# Altium PCB SwiftCtrl.PcbDoc
Units mil, origin at the board's own origin, x right, y up, seen from the top; angles counter-clockwise.
Board outline 5511.51 x 1574.8 mil, 2 copper layers (Top Layer, Bottom Layer); 62 components, 51 nets, 266 pads, 35 vias.
Unrouted connection lines stored in the file: 5.
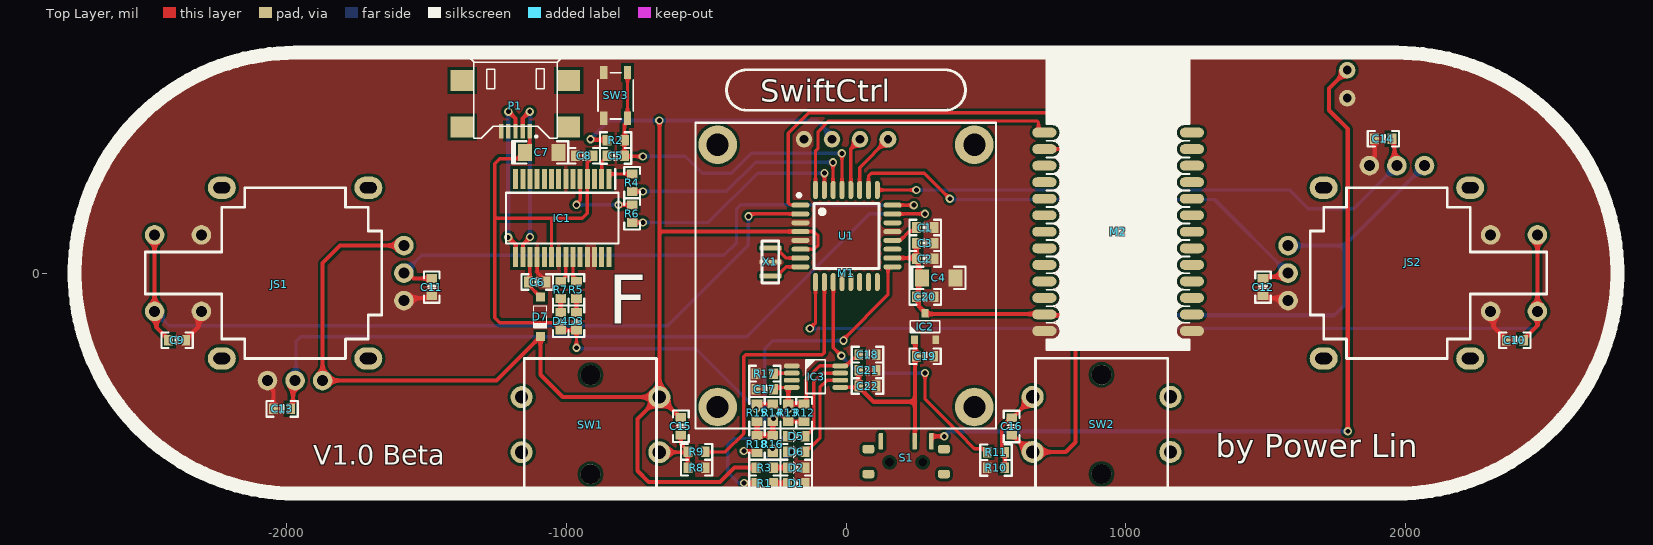
[diagram p0: Top Layer view]
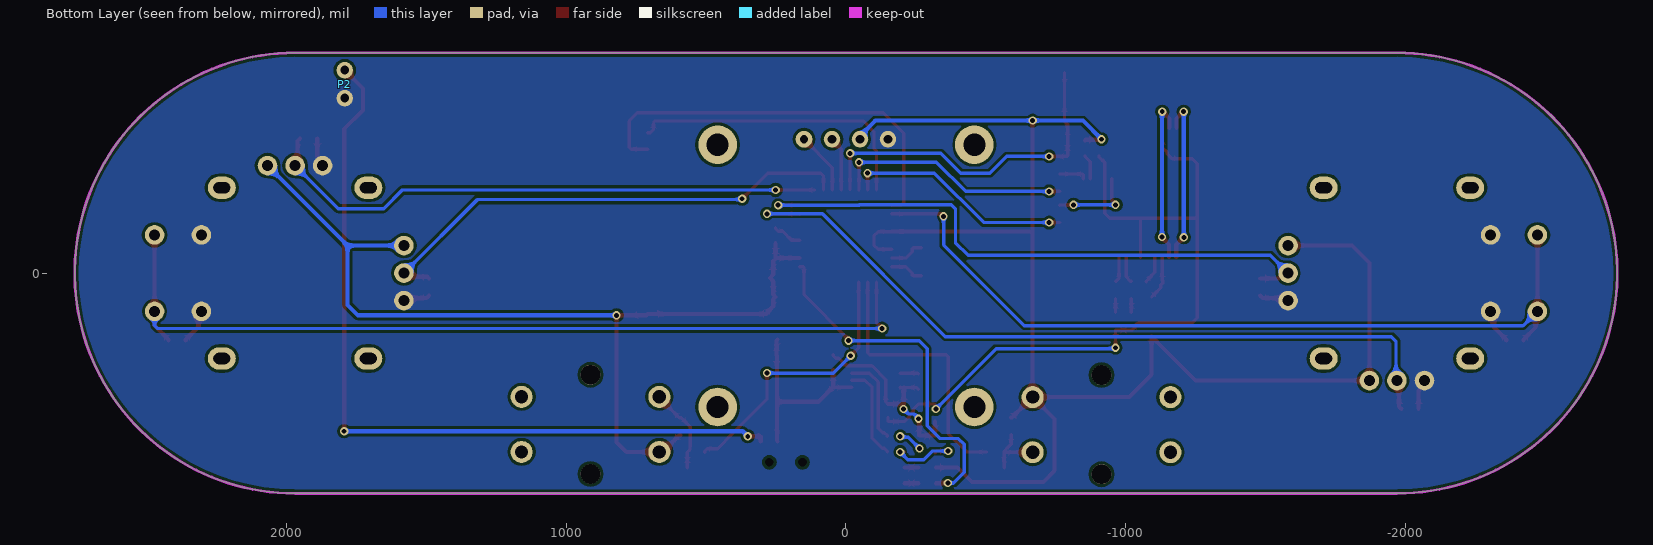
[diagram p1: Bottom Layer view, seen from below]
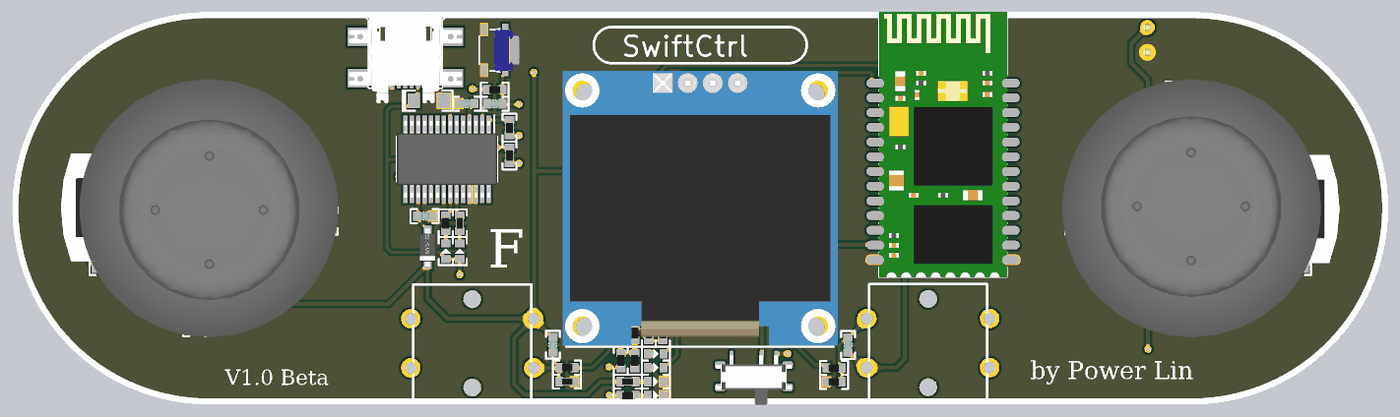
[diagram p2: 3D render of the assembled board from above, using the file's embedded part models]

## Layer stack, top to bottom
Top Solder: solder mask 0.4, Solder Resist, Dk 3.5
Top Layer: signal copper 1.4
Dielectric 1: dielectric 12.6, FR-4, Dk 4.8
Bottom Layer: signal copper 1.4
Bottom Solder: solder mask 0.4, Solder Resist, Dk 3.5

## Board outline
-1968.5,-787.4 cw(c-1968.5,0) -1968.5,787.4 1968.5,787.4 cw(c1968.5,0) 1968.5,-787.4

## Design rules (kind name [scope] priority, off if disabled: settings)
Clearance [All] p1: gap=10 ignorepadtopadclearanceinfootprint=TRUE except(0: Arc-Hole Track-Hole SMDPad-Hole THPad-Hole Via-Hole Fill-Hole Poly-Hole Region-Hole Text-Hole)
ComponentClearance [All] p1: gap=0 collisioncheckmode=3 verticalgap=0 showdistances=FALSE
DiffPairsRouting [All] p1: maxlimit=10 minlimit=10 mostfreqgap=10 toplayer_minwidth=15 toplayer_maxwidth=15 toplayer_prefwidth=15 bottomlayer_minwidth=15 bottomlayer_maxwidth=15 bottomlayer_prefwidth=15 maxuncoupledlength=500
PlaneConnect [All] p1: planeconnectstyle=Direct reliefexpansion=20 reliefentries=4 reliefconductorwidth=10 reliefairgap=10
PolygonConnect [All] p1: connectstyle=Direct reliefconductorwidth=10 reliefentries=4 polygonreliefangle="90 Angle" airgapwidth=10
RoutingVias [All] p1: holewidth=17.72 width=29.53 viastyle="Through Hole" minholewidth=17.72 minwidth=29.53 maxholewidth=17.72 maxwidth=29.53
SolderMaskExpansion [All] p1: expansion=4 istentingtop=FALSE
Width [All] p1: maxlimit=50 minlimit=12 preferedwidth=12
27 further rules are at their usual default settings.

## Classes and differential pairs
component class U_Power: C17 C18 C19 C20 C21 C22 D5 D6 IC2 IC3 P2 R12 R13 R14 R15 R16 R17 R18 S1
component class U_MCU: C1 C2 C3 C4 C5 C6 C7 C8 D1 D2 D3 D4 D7 IC1 P1 R1 R2 R3 R4 R5 R6 R7 SW3 U1 X1
component class U_Dev: C9 C10 C11 C12 C13 C14 C15 C16 JS1 JS2 M1 M2 R8 R9 R10 R11 SW1 SW2
differential pair USB: +USB_P -USB_N

## Components (designator, comment, footprint, x,y, rotation, side; value= is the part's Value field where it differs from the comment)
C1 "100nF" CAP-0603 283.1,162.85 r180 top
C2 "1uF" CAP-0603 283,51 r180 top
C3 "1uF" CAP-0603 283,107 r180 top
C4 "4.7uF 16V" CAP-AUX-3216 316,-25 r180 top
C5 "100nF" CAP-0603 -823,419 r0 top
C6 "100nF" CAP-0603 -1103.35,-31.77 r180 top
C7 "4.7uF 16V" CAP-AUX-3216 -1103.35,423.23 r180 top
C8 "100nF" CAP-0603 -935.04,419.17 r0 top
C9 "220pF" CAP-0603 -2390,-240 r180 top
C10 "220pF" CAP-0603 2390,-240 r0 top
C11 "220pF" CAP-0603 -1480,-50 r90 top
C12 "220pF" CAP-0603 1490,-50 r270 top
C13 "220pF" CAP-0603 -2015,-485 r180 top
C14 "220pF" CAP-0603 1920,480 r0 top
C15 "100nF" CAP-0603 -590,-547 r90 top
C16 "100nF" CAP-0603 592,-548 r270 top
C17 "10nF" CAP-0603 -290,-415 r180 top
C18 "100nF" CAP-0603 76.84,-291.41 r0 top
C19 "1uF" CAP-0603 282.45,-297 r180 top
C20 "1uF" CAP-0603 283,-85 r180 top
C21 "100nF" CAP-0603 76.84,-347.41 r180 top
C22 "10nF" CAP-0603 76.84,-403.41 r180 top
D1 "GREEN" LED-0603 -178,-751 r0 top
D2 "RED" LED-0603 -178,-695 r0 top
D3 "RED" LED-0603 -963,-172.03 r90 top
D4 "RED" LED-0603 -1019.35,-172.03 r90 top
D5 "RED" LED-0603 -178,-583 r0 top
D6 "RED" LED-0603 -178,-639 r0 top
D7 "SS14" SOD_123 -1092,-156 r90 top
IC1 "FT232RL" SSOP -1013.78,196.85 r270 top
IC2 "ME6211A33M3G-N" SOT-23-3 282.45,-190.91 r270 top
IC3 "TP4056" MSOP_E120_P0.5_10 -108.74,-371 r270 top
JS1 "JoyStick" JOYSTICK -1968.5,0 r0 top locked
JS2 "JoyStick" JOYSTICK 1968.5,0 r180 top locked
M1 "OLED_0.96_Moudle" OLED_0.96_MOUDLE 0,0 r0 top locked
M2 "HC-06" HC-05/06/08V15 972.44,147.64 r90 top
P1 "USB_MICRO" "MICRO USB座 -全贴片" -1181,597.5 r0 top
P2 "HDR1x2_2.54" HDR1X2_2.54_90 1791,725 r180 bottom
R1 "330R" R-0603 -290,-751 r0 top
R2 "1K" R-0603 -823,475 r0 top
R3 "10K" R-0603 -290,-695 r0 top
R4 "1K" R-0603 -764,323 r90 top
R5 "1K" R-0603 -963,-60.1 r270 top
R6 "1K" R-0603 -764,211.73 r90 top
R7 "1K" R-0603 -1019.35,-60.1 r270 top
R8 "4.7k" R-0603 -533.9,-695 r180 top
R9 "1k" R-0603 -533.9,-639 r180 top
R10 "4.7k" R-0603 536,-696 r0 top
R11 "1k" R-0603 536,-640 r0 top
R12 "1R" R-0603 -150,-499 r270 top
R13 "1R" R-0603 -206,-499 r270 top
R14 "1R" R-0603 -262,-499 r90 top
R15 "1R" R-0603 -318,-499 r90 top
R16 "2K" R-0603 -262,-611 r90 top
R17 "1.2K" R-0603 -290,-359 r0 top
R18 "10K" R-0603 -318,-611 r90 top
S1 "Switch_SPDT" SWITCHSPDT_2.8X6.6_90 214.94,-676 r0 top value="SPDT 3P"
SW1 "KEY" KEY_12*12*7.3 -913.06,-541.57 r0 top locked
SW2 "KEY" KEY_12*12*7.3 913.06,-540.57 r180 top locked
SW3 "KEY" KEY-4P-4.2*3.4*2.5 -823,635 r90 top
U1 "ATMEGA328P-AU" TQFP-32_7X7X08P 1.5,132.6 r270 top
X1 "16MHz" CSTCE_G(A)村田晶振 -270,40 r90 top

## Footprints (in the part's own frame and the unit in brackets; to place one, negate y for a bottom-side part, rotate by r counter-clockwise, add the part's x,y. Pads: shape width x height; smd on the part's side, far side on the other; paste and mask are expansions set on the pad)
CAP-0603 [mm]
  rect 0.8x0.96 smd: 1(-0.79,0) 2(0.79,0)
  silkscreen extent -1.42,-0.71 1.42,0.71, body extent -0.76,-0.39 0.76,0.39, height 0.9
CAP-AUX-3216 [mil] "钽电容1206大小"
  rect 50x60 smd: 1(44,-8) 2(-76,-8)
  silkscreen extent -111,-48 89,32, body extent -82,-45 52,26, height 67
CSTCE_G(A)村田晶振 [mm]
  rrect50% 0.45x2 smd: 1(1.27,0) 2(0,0) 3(-1.27,0)
  silkscreen extent -1.91,-0.76 1.91,0.76, body extent -1.9,-0.8 1.9,0.8, height 1
HC-05/06/08V15 [mm]
  oval 0.9x2.2 smd: 1(9,6.7) 2(7.5,6.7) 3(6,6.7) 4(4.5,6.7) 5(3,6.7) 6(1.5,6.7) 7(0,6.7) 8(-1.5,6.7) 9(-3,6.7) 10(-4.5,6.7) 11(-6,6.7) 12(-7.5,6.7) 13(-9,6.7) 22(-9,-6.7) 23(-7.5,-6.7) 24(-6,-6.7) 25(-4.5,-6.7) 26(-3,-6.7) 27(-1.5,-6.7) 28(0,-6.7) 29(1.5,-6.7) 30(3,-6.7) 31(4.5,-6.7) 32(6,-6.7) 33(7.5,-6.7) 34(9,-6.7)
  silkscreen extent -10.75,-6.5 16.15,6.5, body extent -10.77,-6.5 16.23,6.5, height 4.31
HDR1X2_2.54_90 [mm]
  round 1.5 hole 0.813: 1(0,0) 2(0,-2.54)
  body extent -0.38,-3.71 10.76,1.17, height 2.52
JOYSTICK [mil]
  oval 100x80 hole 40 slot 60 at 0 deg: 0(-261.81,-305.12) 0(-261.81,305.12) 0(261.81,-305.12) 0(261.81,305.12)
  round 70 hole 39.37: 1(-98.43,-383.86) 2(0,-383.86) 3(98.43,-383.86) 4(388.86,-98.43) 5(388.86,0) 6(388.86,98.43) 7(-501.97,136.57) 8(-334.8,136.57) 9(-501.97,-136.57) 10(-334.8,-136.57)
  silkscreen extent -535,-305 310,305, body extent -592,-518 518,518, height 1126
KEY-4P-4.2*3.4*2.5 [mm] "SKRPABE010"
  rect 1.2x0.65 smd: 1(-2.075,1.075) 1(2.075,1.075) 2(-2.075,-1.075) 2(2.075,-1.075)
  silkscreen extent -2.15,-1.6 2.05,1.6, body extent -2.35,-1.6 2.25,1.6, height 2.5
KEY_12*12*7.3 [mm] "轻触开关 B3F-4055"
  round 1.8 hole 1.8: 0(0,-4.5) 0(0,4.5)
  round 2 hole 1.2: 1(6.25,-2.5) 2(6.25,2.5) 3(-6.25,-2.5) 4(-6.25,2.5)
  silkscreen extent -6,-6 6,6, body extent -6,-6.02 6.04,6, height 9
LED-0603 [mm]
  rect 0.8x0.96 smd: 1(-0.79,0) 2(0.79,0)
  silkscreen extent -1.42,-0.71 1.42,0.71, body extent -0.81,-0.4 0.81,0.4, height 0.6
"MICRO USB座 -全贴片" [mm]
  rect 2.1x1.9 smd: 0(-4.826,-1.918) 0(-4.826,2.299) 0(4.826,-1.918) 0(4.826,2.299)
  rect 0.4x1.35 smd: 1(1.3,-2.299) 2(0.65,-2.299) 3(0,-2.299) 4(-0.65,-2.299) 5(-1.3,-2.299)
  silkscreen extent -4.24,-2.96 4.27,4.43, body extent -5.74,-4.5 5.76,4.8, height 2.74
MSOP_E120_P0.5_10 [mm]
  oval 0.45x1.45 smd: 1(-1,-2.159) 2(-0.35,-2.159) 3(0.3,-2.159) 4(0.95,-2.159) 5(0.95,2.241) 6(0.3,2.241) 7(-0.35,2.241) 8(-1,2.241)
  silkscreen extent -1.55,-0.89 1.5,0.89, body extent -1.52,-2.45 1.47,2.45, height 0.97
OLED_0.96_MOUDLE [mm]
  round 1.5 hole 0.813: 1(-3.81,12.15) 2(-1.27,12.15) 3(1.27,12.15)
  round 1.524 hole 0.762: 4(3.81,12.15)
  round 3.5 hole 2: 8(-11.65,11.65) 9(-11.65,-12.15) 10(11.65,-12.15) 11(11.65,11.65)
  silkscreen extent -13.65,-14.1 13.6,13.65, body extent -14,-14 14,14, height 10.5
R-0603 [mm]
  rect 0.8x0.96 smd: 1(-0.79,0) 2(0.79,0)
  silkscreen extent -1.42,-0.71 1.42,0.71, body extent -0.76,-0.38 0.76,0.38, height 0.41
SOD_123 [mm]
  rect 0.8x0.8 smd: 1(1.8,0) 2(-1.8,0)
  silkscreen extent -1.02,-0.6 1.02,0.6, body extent -1.95,-0.85 1.9,0.85, height 1.42
SOT-23-3 [mil]
  rect 30x24 smd: 1(47,-38) 2(47,38) 3(-47,0)
  silkscreen extent -21,-53 21,53, body extent -55,-57 55,57, height 51
SSOP [mm]
  rect 1.8x0.45 smd: 1(-3.55,4.225) 2(-3.55,3.575) 3(-3.55,2.925) 4(-3.55,2.275) 5(-3.55,1.625) 6(-3.55,0.975) 7(-3.55,0.325) 8(-3.55,-0.325) 9(-3.55,-0.975) 10(-3.55,-1.625) 11(-3.55,-2.275) 12(-3.55,-2.925) 13(-3.55,-3.575) 14(-3.55,-4.225) 15(3.55,-4.225) 16(3.55,-3.575) 17(3.55,-2.925) 18(3.55,-2.275) 19(3.55,-1.625) 20(3.55,-0.975) 21(3.55,-0.325) 22(3.55,0.325) 23(3.55,0.975) 24(3.55,1.625) 25(3.55,2.275) 26(3.55,2.925) 27(3.55,3.575) 28(3.55,4.225)
  silkscreen extent -4.45,-5.1 2.3,5.1, body extent -3.9,-5.1 3.9,5.1, height 2
SWITCHSPDT_2.8X6.6_90 [mil]
  rrect50% 42x30 smd: 0(-135,-42) 0(-135,47) 0(135,-42) 0(135,47)
  round 10 hole 31.5: 0(-59.06,0) 0(59.06,0)
  rrect50% 16x60 smd: 1(90,75) 2(30,75) 3(-90,75)
  body extent -152,-111 151,86, height 55
TQFP-32_7X7X08P [mm]
  oval 0.45x1.65 smd: 1(-2.8,-4.175) 2(-2,-4.175) 3(-1.2,-4.175) 4(-0.4,-4.175) 5(0.4,-4.175) 6(1.2,-4.175) 7(2,-4.175) 8(2.8,-4.175) 17(2.8,4.175) 18(2,4.175) 19(1.2,4.175) 20(0.4,4.175) 21(-0.4,4.175) 22(-1.2,4.175) 23(-2,4.175) 24(-2.8,4.175)
  oval 1.65x0.45 smd: 9(4.175,-2.8) 10(4.175,-2) 11(4.175,-1.2) 12(4.175,-0.4) 13(4.175,0.4) 14(4.175,1.2) 15(4.175,2) 16(4.175,2.8) 25(-4.175,2.8) 26(-4.175,2) 27(-4.175,1.2) 28(-4.175,0.4) 29(-4.175,-0.4) 30(-4.175,-1.2) 31(-4.175,-2) 32(-4.175,-2.8)
  silkscreen extent -3.85,-4.45 2.95,2.95, body extent -4.5,-4.5 4.5,4.5, height 1.6

## Part data
C1 C2 C3 C5 C6 C8 C9 C10 C11 C12 C13 C14 C15 C16 C17 C18 C19 C20 C21 C22: library part CAP, "贴片电容", Package=0402, SuppliersPartNumber=C52923, ComponentLink1Description=供应商链接, ComponentLink1URL=http://www.szlcsc.com/product/details_53938.html, Supplier=LC
C4 C7: library part CAP-POL, "贴片电容-有极性", Package=3528, SuppliersPartNumber=C16133, ComponentLink1Description=供应商链接, ComponentLink1URL=http://www.szlcsc.com/product/details_16815.html, Supplier=LC
D1 D2 D3 D4 D5 D6: library part LED, "发光二极管", Package=0603, SuppliersPartNumber=C2290, ComponentLink1Description=供应商链接, ComponentLink1URL=http://www.szlcsc.com/product/details_2663.html, Supplier=LC
D7: library part DIODE, "二极管", Package=SMA(DO-214AC), SuppliersPartNumber=C22452, ComponentLink1Description=供应商链接, ComponentLink1URL=http://www.szlcsc.com/product/details_23178.html, Supplier=LC
IC1: "USB to UART", Manufacturer_Name="FTDI Chip", RS Part Number=0406580P, Datasheet Link=http://www.ftdichip.com/Support/Documents/DataSheets/ICs/DS_FT232R.pdf, Height=2mm, Manufacturer_Part_Number=FT232RL, RS Price/Stock=http://uk.rs-online.com/web/p/products/0406580P
IC2: "线性稳压", Manufacturer_Name=Nexperia, Manufacturer_Part_Number=SI2302DS, Mouser Part Number=N/A, RS Part Number=7983053P, Datasheet Link=https://assets.nexperia.com/documents/data-sheet/SI2302DS.pdf, Height=1.1mm, Mouser Price/Stock=https://www.mouser.com/Search/Refine.aspx?Keyword=N%2FA, RS Price/Stock=http://uk.rs-online.com/web/p/products/7983053P
IC3: "锂电池充电（1A 线性）", Manufacturer_Name="Nanjing Extension Microelectronics", Manufacturer_Part_Number=TP4056-42-ESOP8, Datasheet Link=https://datasheet.lcsc.com/szlcsc/1906261508_Nanjing-Extension-Microelectronics-TP4056-42-ESOP8_C16581.pdf, Height=1.75mm
JS1 JS2: "摇杆"
M1: "OLED 屏"
M2: library part HC-05/06, "HC05/06 蓝牙模块（贴片）", Manufacturer_Name="FTDI Chip", Manufacturer_Part_Number=FT232RL, RS Part Number=0406580P, Datasheet Link=http://www.ftdichip.com/Support/Documents/DataSheets/ICs/DS_FT232R.pdf, Height=2mm, RS Price/Stock=http://uk.rs-online.com/web/p/products/0406580P
P1: "USB 接口"
P2: "Header"
R1 R2 R3 R4 R5 R6 R7 R8 R9 R10 R11 R12 R13 R14 R15 R16 R17 R18: library part RES, "贴片电阻", Package=0805, SuppliersPartNumber=C17798, Supplier=LC
SW1 SW2 SW3: "按键开关"
U1: "微控制器, 8 Bit, Atmega, 20mhz, Tqfp-32", Package="TQFP-32 Microchip", Availability=Unavailable, MF=Microchip, MP=ATMEGA328P-AU, Price=None, SnapEDA_Link=https://www.snapeda.com/parts/ATMEGA328P-AU/Microchip/view-part/?ref=snap
X1: library part XTAL, "有源晶振"
S1: Type=SPDT

## Via types
v1: diameter 29.53, hole 17.72, Top Layer to Bottom Layer, 35 vias

## Nets (pads, with @x,y where several pads share a name; then routed paths per layer and width w, separated by ;. In a path a pad name is that pad's centre, name@x,y a point inside that pad or via, vN(x,y) a via of type N, cw(c..) or ccw(c..) an arc to the next point about the centre after c; other vN are vias at no path point)
3.3V: C2.2 C3.2 C4.1 C15.2 C16.2 C20.2 D7.2 IC2.3 JS1.3 JS1.6 JS2.1 JS2.4 M1.2 M2.12 R2.1 R3.1 SW1.2 SW2.2 U1.4 U1.6 U1.18 | length 9106.8
  Top Layer w12: SW1.2 SW1.2@-665.9,-442.05 ; U1.6 -114.65,85.35 -100,100 -100,133.7 -114.65,148.35 U1.4
  Top Layer w15: JS1.6 -1807.57,98.43 -1870.08,35.92 JS1.3 -1248.99,-383.86 D7.2 -1092,-363.34 -1012.19,-443.15 SW1.2@-683,-443.15 ; v1(-913.06,478.35) -911.39,476.67 -855.78,476.67 R2.1 ; v1(-667,545.06) -665.9,543.96 -665.9,139.56 ; SW1.2@-665.9,-442.05 -665.9,139.56 ; C15.2 -593.15,-515.9 -665.9,-443.15 SW1.2 SW1.2@-683,-443.15 ; R3.1 -398.68,-695 -449.68,-746 -705,-746 -745,-706 -745,-521.15 -683,-459.15 SW1.2@-683,-443.15 ; U1.4 -657.11,148.35 -665.9,139.56 ; U1.18 249.04,53.86 C2.2 ; C3.2 C2.2 ; C16.2 595.15,-579.1 655.05,-639 SW2.2 785,-639 819.61,-604.39 v1(819.61,-150.93) 712.59,-150.93 708.98,-147.32 M2.12 706.8,-145.77 284.32,-145.77 IC2.3 282.45,-140.91 260.15,-118.6 260.15,-93.25 C20.2 259.84,-77.06 259.84,-29.16 C4.1 259.84,-4.84 259.84,43.06 C2.2
  Bottom Layer w15: v1(-913.06,478.35) -846.35,545.06 v1(-667,545.06) -104.79,545.06 -50,490.27 M1.2 ; v1(819.61,-150.93) 1744.07,-150.93 1781.5,-113.5 1781.5,98.43 ; JS2.4 1781.5,98.43 ; JS2.1 1781.5,98.43
5V: C7.1 C8.2 D3.1 D4.1 IC1.4 IC1.20 P1.1 R12.2 R13.2 R14.2 R15.2 | length 2811.6
  Top Layer w12: P1.1@-1129.92,519.14 -1129.92,448.65 C7.1 -1147.35,426.23 -1164.85,408.73 -1237.27,408.73 -1255,391 -1255,203.03 ; IC1.20 -1052.17,194.17 -1054,196 ; v1(-963,-266.71) D3.1 D4.1 -1022.5,-203.13 -1032.25,-193.39 -1032.25,-190.24 -1045.68,-176.81 -1237.27,-176.81 -1255,-159.08 -1255,203.03 ; C8.2 -903.94,416.02 -924.21,395.74 IC1.4 -924.94,335.88 -924.94,213.06 -942,196 -1054,196 ; v1(-320.76,-485.59) -318,-482.82 R15.2 R14.2 -258.85,-467.9 -240.9,-485.85 -240.9,-493.93 -227.1,-507.73 -227.1,-512.15 -209.15,-530.1 R13.2 R12.2 -150,-514 ; -1255,203.03 -1247.97,196 -1054,196
  Bottom Layer w12: v1(-963,-266.71) -959.71,-270 -536.35,-270 v1(-320.76,-485.59)
AREF: C1.2 U1.20 | length 107
  Top Layer w12: U1.20 166.96,117.94 194.8,117.94 226.8,149.95 242.25,149.95 252,159.7 C1.2
D0: R4.1 U1.30 | length 859.8
  Top Layer w12: R4.1 v1(-726,291.9) ; v1(-46.82,396) -46.28,395.47 -46.28,297.5 U1.30
  Bottom Layer w12: v1(-726,291.9) -427.36,291.9 -323.26,396 v1(-46.82,396)
D1: R6.1 U1.31 | length 820.1
  Top Layer w12: R6.1 v1(-726,180.63) ; U1.31 -77.14,297.07 -77.14,356.9 v1(-77.05,357)
  Bottom Layer w12: v1(-726,180.63) -725.37,180.63 -725,181 -491.39,181 -315.39,357 v1(-77.05,357)
D13: R1.1 U1.17 | length 1290.5
  Top Layer w12: v1(-8.63,-241.35) -8.63,-235.6 150,-76.97 150,19.72 152.64,22.36 U1.17
  Top Layer w15: v1(-364,-750) -363.5,-750.5 -321.6,-750.5 R1.1
  Bottom Layer w12: v1(-364,-750) -364.67,-749.33 -385.67,-749.33 -422.79,-712.21 -422.79,-612 -401.79,-591 -336,-591 -290,-545 -290,-270 -261.35,-241.35 v1(-8.63,-241.35)
GND: C1.1 C2.1 C3.1 C4.2 C6.1 C7.2 C8.1 C9.1 C10.1 C11.1 C12.2 C13.2 C14.1 C17.2 C18.2 C19.1 C20.1 C21.1 C22.1 D1.2 D2.2 IC1.7 IC1.18 IC1.21 IC1.25 IC1.26 IC2.2 IC3.1 IC3.3 JS1.1 JS1.4 JS1.8 JS1.10 JS2.3 JS2.6 JS2.8 JS2.10 M1.1 M2.13 M2.22 P1.5 P2.2 R8.1 R10.1 R17.1 SW3.1 U1.3 U1.5 U1.21 X1.2 | length 772
  Top Layer w12: IC1.18 -1103.35,2.48 -1072.24,-28.62 C6.1
  Top Layer w15: C9.1 -2358.9,-236.85 -2313.83,-191.78 -2313.83,-147.1 JS1.10 ; JS1.1 -2066.93,-398.74 -2046.1,-419.57 C13.2 ; JS1.4 -1570.57,-89.35 -1488.25,-89.35 C11.1 ; C12.2 1498.25,-89.35 1570.57,-89.35 JS2.6 ; JS2.3 1870.08,398.74 1888.9,417.56 C14.1 ; JS2.8 2313.83,-147.1 2313.83,-191.78 2358.9,-236.85 C10.1
NetC5_1: C5.1 IC1.2 | length 90.2
  Top Layer w12: IC1.2 -872.3,337.35 -872.3,397.65 -854.1,415.85 C5.1
NetC6_2: C6.2 D7.1 IC1.17 | length 162.1
  Top Layer w12: IC1.17 -1129.67,56.35 -1129.67,-26.99 C6.2 -1124.7,-41.52 -1124.7,-52.43 D7.1
NetC9_2: C9.2 JS1.7 JS1.9 U1.2 | length 2951.7
  Top Layer w12: v1(-348.67,203) -340,211.67 -163.2,211.67 U1.2
  Top Layer w15: JS1.7 JS1.9 -2463.88,-143.17 -2463.88,-194.07 -2421.1,-236.85 C9.2
  Bottom Layer w12: JS1.9 -2419.05,-188 -637.02,-188 -348.67,100.35 v1(-348.67,203)
NetC10_2: C10.2 JS2.7 JS2.9 U1.9 | length 3226.9
  Top Layer w12: v1(-129.27,-198.07) -129.27,-197.34 -108.74,-176.81 U1.9
  Top Layer w15: C10.2 2421.1,-236.85 2470.47,-187.48 JS2.7 JS2.9
  Bottom Layer w12: v1(-129.27,-198.07) -129.21,-198 2459.95,-198 2470.47,-187.48 JS2.7
NetC11_2: C11.2 JS1.5 U1.24 | length 2177.9
  Top Layer w12: U1.24 v1(242.25,242.83)
  Top Layer w15: JS1.5 -1564.76,0 -1545.86,-18.9 C11.2
  Bottom Layer w12: JS1.5 -1515.65,64 -436,64 -391,109 -391,229.61 -376.69,243.93 -47.91,243.93 -46.82,242.83 v1(242.25,242.83)
NetC12_1: C12.1 JS2.5 U1.26 | length 1798.5
  Top Layer w12: U1.26 80.24,346.24 91,357 279.75,357 v1(371,265.75)
  Top Layer w15: C12.1 1496.1,-12.8 1551.97,-12.8 1564.76,0 JS2.5
  Bottom Layer w12: v1(371,265.75) 373.75,263 1316.65,263 JS2.5
NetC13_1: C13.1 JS1.2 U1.23 | length 2802.6
  Top Layer w12: U1.23@166.2,211.67 v1@282.12,211.67
  Top Layer w15: C13.1 -1976.2,-477.3 -1976.2,-391.56 JS1.2 ; U1.23 U1.23@166.2,211.67 ; v1@282.12,211.67 v1(282.45,212)
  Bottom Layer w12: JS1.2 -1965,-380.35 -1965,-243 -1948.87,-226.87 -354.87,-226.87 84,212 v1(282.45,212)
NetC14_2: C14.2 JS2.2 U1.25 | length 2051.6
  Top Layer w12: U1.25 v1(251.35,296.97)
  Top Layer w15: C14.2 1959.35,471.75 1959.35,393.01 JS2.2
  Bottom Layer w12: v1(251.35,296.97) 1585.03,296.97 1652,230 1814.65,230 JS2.2
NetC15_1: C15.1 R8.2 R9.2 SW1.1 | length 230.3
  Top Layer w12: SW1.1 -566,-640 R9.2 ; C15.1 -590,-611.85 -582.97,-618.88 -581.97,-618.88 -565,-635.85 R9.2 ; R8.2 R9.2
NetC16_1: C16.1 R10.2 R11.2 SW2.1 | length 307.2
  Top Layer w12: R10.2 R11.2 557.35,-630.25 557.35,-620.32 557.1,-620.07 557.1,-548.65 588.85,-516.9 C16.1 595.15,-516.9 667,-445.05 SW2.1
NetC17_1: C17.1 C18.1 IC3.4 IC3.8 R12.1 R13.1 R14.1 R15.1 R16.2 R18.2 | length 755.7
  Top Layer w12: R14.1 -262,-523.13 v1(-259.24,-520.37) ; C17.1 -252.82,-408.92 -209.15,-408.92 -194.26,-408.92 IC3.4 ; R13.1 -205.74,-468.16 v1(-205.74,-485.59) ; R12.1 -141.73,-459.63 -141.73,-380.4 -92.96,-331.63 IC3.8 -0.83,-331.63 26.5,-304.31 35.99,-304.31 45.74,-294.56 C18.1
  Top Layer w15: R15.1 R18.2 R16.2 R14.1 ; IC3.4@-209.15,-409.17 -206.49,-409.17 -206,-409.66 R13.1 R12.1
  Bottom Layer w12: v1(-259.24,-520.37) -259.24,-518.74 -243.99,-503.5 -223.65,-503.5 v1(-205.74,-485.59)
NetD1_A: D1.1 R1.2 | length 49.8
  Top Layer w15: R1.2 D1.1
NetD2_A: D2.1 R3.2 | length 49.8
  Top Layer w15: R3.2 D2.1
NetD3_K: D3.2 R5.2 | length 49.7
  Top Layer w12: D3.2 R5.2
NetD4_K: D4.2 R7.2 | length 49.7
  Top Layer w12: D4.2 R7.2
NetD5_A: D5.1 R16.1 | length 87.3
  Bottom Layer w12: v1(-262.8,-626.97) -222.18,-586.35 -197.09,-586.35 v1(-193.74,-583)
NetD5_K: D5.2 IC3.7 | length 318.3
  Top Layer w12: D5.2 -146.9,-579.85 -137.15,-570.1 -131.14,-570.1 -114.96,-553.92 -114.96,-389.03 -83.15,-357.22 IC3.7
NetD6_A: D6.1 R18.1 | length 260.5
  Top Layer w12: v1(-365.16,-635.85) -324.25,-635.85 R18.1 ; D6.1 v1(-193.74,-639)
  Bottom Layer w12: v1(-365.16,-635.85) -307.95,-635.85 -277.46,-666.34 -221.08,-666.34 v1(-193.74,-639)
NetD6_K: D6.2 IC3.6 | length 340.4
  Top Layer w12: D6.2 -146.9,-635.85 -137.15,-626.1 -130.42,-626.1 -130.12,-625.8 -129.27,-625.8 -92.96,-589.49 -92.96,-408.4 -67.37,-382.81 IC3.6
NetIC1_1: IC1.1 R4.2 | length 99.3
  Top Layer w12: IC1.1 -847.44,351.24 -844.58,354.1 R4.2
NetIC1_5: IC1.5 R6.2 | length 297.6
  Top Layer w12: v1(-963,243.93) -963,248.67 -949.8,261.87 IC1.5 ; v1(-813,243.93) -812.45,243.38 -764.55,243.38 R6.2
  Bottom Layer w12: v1(-963,243.93) v1(-813,243.93)
NetIC1_22: IC1.22 R7.1 | length 95.5
  Top Layer w12: R7.1 -1016.2,-29 -1000.98,-13.78 IC1.22
NetIC1_23: IC1.23 R5.1 | length 92.8
  Top Layer w12: IC1.23 -975.39,-19.25 -965.65,-29 R5.1
NetIC3_2: IC3.2 R17.2 | length 65.9
  Top Layer w12: R17.2 -257.12,-357.22 IC3.2
NetM1_3: M1.3 U1.28 | length 194.9
  Top Layer w12: U1.28 17.24,443.89 50,476.64 M1.3
NetM1_4: M1.4 U1.27 | length 223.3
  Top Layer w12: U1.27 48.74,377.09 M1.4
NetM2_1: M2.1 U1.32 | length 1067.4
  Top Layer w12: U1.32 -108.74,437.45 -100,446.19 -100,505 -61.44,543.56 680.99,543.56 688.02,536.53 688.02,512.79 698.85,501.97 M2.1
NetM2_2: M2.2 U1.1 | length 1481.8
  Top Layer w12: U1.1 -163.97,243.93 -198.56,243.93 -206,251.37 -206,500.43 -133.43,573 745.56,573 775,543.56 775,449.94 767.97,442.91 M2.2
NetP2_1: P2.1 S1.1 | length 2857
  Top Layer w15: S1.1 304.94,-585 306.94,-583 v1(351,-583) ; P2.1 1726,660 1726,582 1793,515 v1(1793,-565)
  Bottom Layer w15: v1(351,-583) 351.05,-583 369.05,-565 v1(1793,-565)
NetR9_1: R9.1 U1.10 | length 986
  Top Layer w12: R9.1 -431,-639 -365.16,-573.16 -365.16,-298.44 -358.13,-291.41 -84.27,-291.41 -77.24,-284.38 U1.10
NetR11_1: R11.1 U1.11 | length 996.5
  Top Layer w12: U1.11 -45.37,-32.15 -45.37,-266.71 v1(-16.78,-295.3) ; v1(282.45,-357.22) 282.45,-450.61 402.15,-570.31 458.94,-627.1 495.15,-627.1 504.9,-636.85 R11.1
  Bottom Layer w12: v1(-16.78,-295.3) 45.14,-357.22 v1(282.45,-357.22)
NetU1_7: U1.7 X1.1 | length 128
  Top Layer w12: X1.1 -239.49,90 -236.63,87.14 -236.63,77.13 -213.35,53.86 U1.7
NetU1_8: U1.8 X1.3 | length 124.2
  Top Layer w12: X1.3 -239.49,-10 -236.63,-7.14 -236.63,-0.91 -213.35,22.36 U1.8
NetU1_12: U1.12
NetU1_13: U1.13
NetU1_14: U1.14
NetU1_15: U1.15
NetU1_16: U1.16
NetU1_19: U1.19
NetU1_22: U1.22
RESET: C5.2 R2.2 SW3.2 U1.29 | length 1265.7
  Top Layer w12: SW3.2@-780.68,716.69 -780.68,553.31 -780.68,542.48 -791.9,531.26 R2.2 C5.2 -789.9,417 v1(-726,417) ; v1(-15,428) -14.25,427.25 U1.29
  Bottom Layer w12: v1(-726,417) -574,417 -514,357 -410,357 -339,428 v1(-15,428)
USB_N: IC1.16 P1.2 | length 599.8
  Top Layer w15: P1.2@-1155.51,519.14 -1155.3,519.35 -1155.3,552.96 -1131.48,576.77 v1(-1129.92,576.77) ; IC1.16 -1154.53,101.83 -1128.94,127.42 v1(-1128.94,128.94)
  Bottom Layer w15: v1(-1129.92,576.77) -1129.43,576.28 -1129.43,129.43 v1(-1128.94,128.94)
USB_P: IC1.15 P1.3 | length 600.7
  Top Layer w15: v1(-1207.01,127.74) -1206.03,127.74 -1180.12,101.83 IC1.15 ; v1(-1206.69,576.77) -1205.13,576.77 -1181.32,552.96 -1181.32,519.35 P1.3@-1181.1,519.14
  Bottom Layer w15: v1(-1207.01,127.74) -1207.01,576.45 v1(-1206.69,576.77)
VBAT: C19.2 C21.2 C22.2 IC2.1 IC3.5 S1.2 | length 716.4
  Top Layer w12: IC3.5 C22.2@40.75,-408.4
  Top Layer w15: C22.2@40.75,-408.4 C22.2 ; C21.2 C22.2 ; IC2.1 247.9,-241.35 247.9,-293.55 246.94,-294.5 246.94,-459.63 ; S1.2 246.94,-599 246.94,-459.63 ; C22.2 45.74,-406.56 98.81,-459.63 246.94,-459.63
pads on no net: IC1.3 IC1.6 IC1.8 IC1.9 IC1.10 IC1.11 IC1.12 IC1.13 IC1.14 IC1.19 IC1.24 IC1.27 IC1.28 JS1.0 JS2.0 M1.8 M1.9 M1.10 M1.11 M2.3 M2.4 M2.5 M2.6 M2.7 M2.8 M2.9 M2.10 M2.11 M2.23 M2.24 M2.25 M2.26 M2.27 M2.28 M2.29 M2.30 M2.31 M2.32 M2.33 M2.34 P1.0 P1.4 S1.0 S1.3 SW1.0 SW1.3 SW1.4 SW2.0 SW2.3 SW2.4

## Polygon pours and split planes (outlines as drawn)
GND on Top Layer "GND_L01_P000" (solid, remove dead copper, pour order 0): -2937.65,1691.11 -2754.65,1508.11 3546.35,1508.11 3546.35,-1568.89 3496.35,-1618.89 3301.35,-1423.89 -3105.65,-1423.89
GND on Bottom Layer "GND_L02_P001" (solid, remove dead copper, pour order 1): -2800,1354 -2697,1251 3547,1251 3547,-1197 3377,-1367 3194,-1184 -2846,-1184

## Keep-outs
Keep-Out Layer:
  the board outline again, w10

## Silkscreen, mask and mechanical layers (free items; w line width, h text height)
Top Overlay:
  lines w10: -354.33,581.69 cw(c-354.33,654.11) -354.33,726.54 354.33,726.54 cw(c354.33,654.11) 354.33,581.69 -354.33,581.69
  lines w50: -1968.5,-787.4 cw(c-1968.5,0) -1968.5,787.4 1968.5,787.4 cw(c1968.5,0) 1968.5,-787.4 -1968.5,-787.4
  text "SwiftCtrl" at -306.57,611.38 h80
  text "F" at -850.3,-237.12 h300
  text "by Power Lin" at 1321.62,-684.37 h140
  text "V1.0 Beta" at -1902.9,-707.76 h120
Mechanical 1:
  the board outline again, w10